# Altium PCB Multi_Board.PcbDoc
Units mil, origin at the board's own origin, x right, y up, seen from the top; angles counter-clockwise.
Board outline 8481.85 x 10278.7 mil, 2 copper layers (Top Layer, Bottom Layer); 4 components, 0 nets, 12 pads, 0 vias.
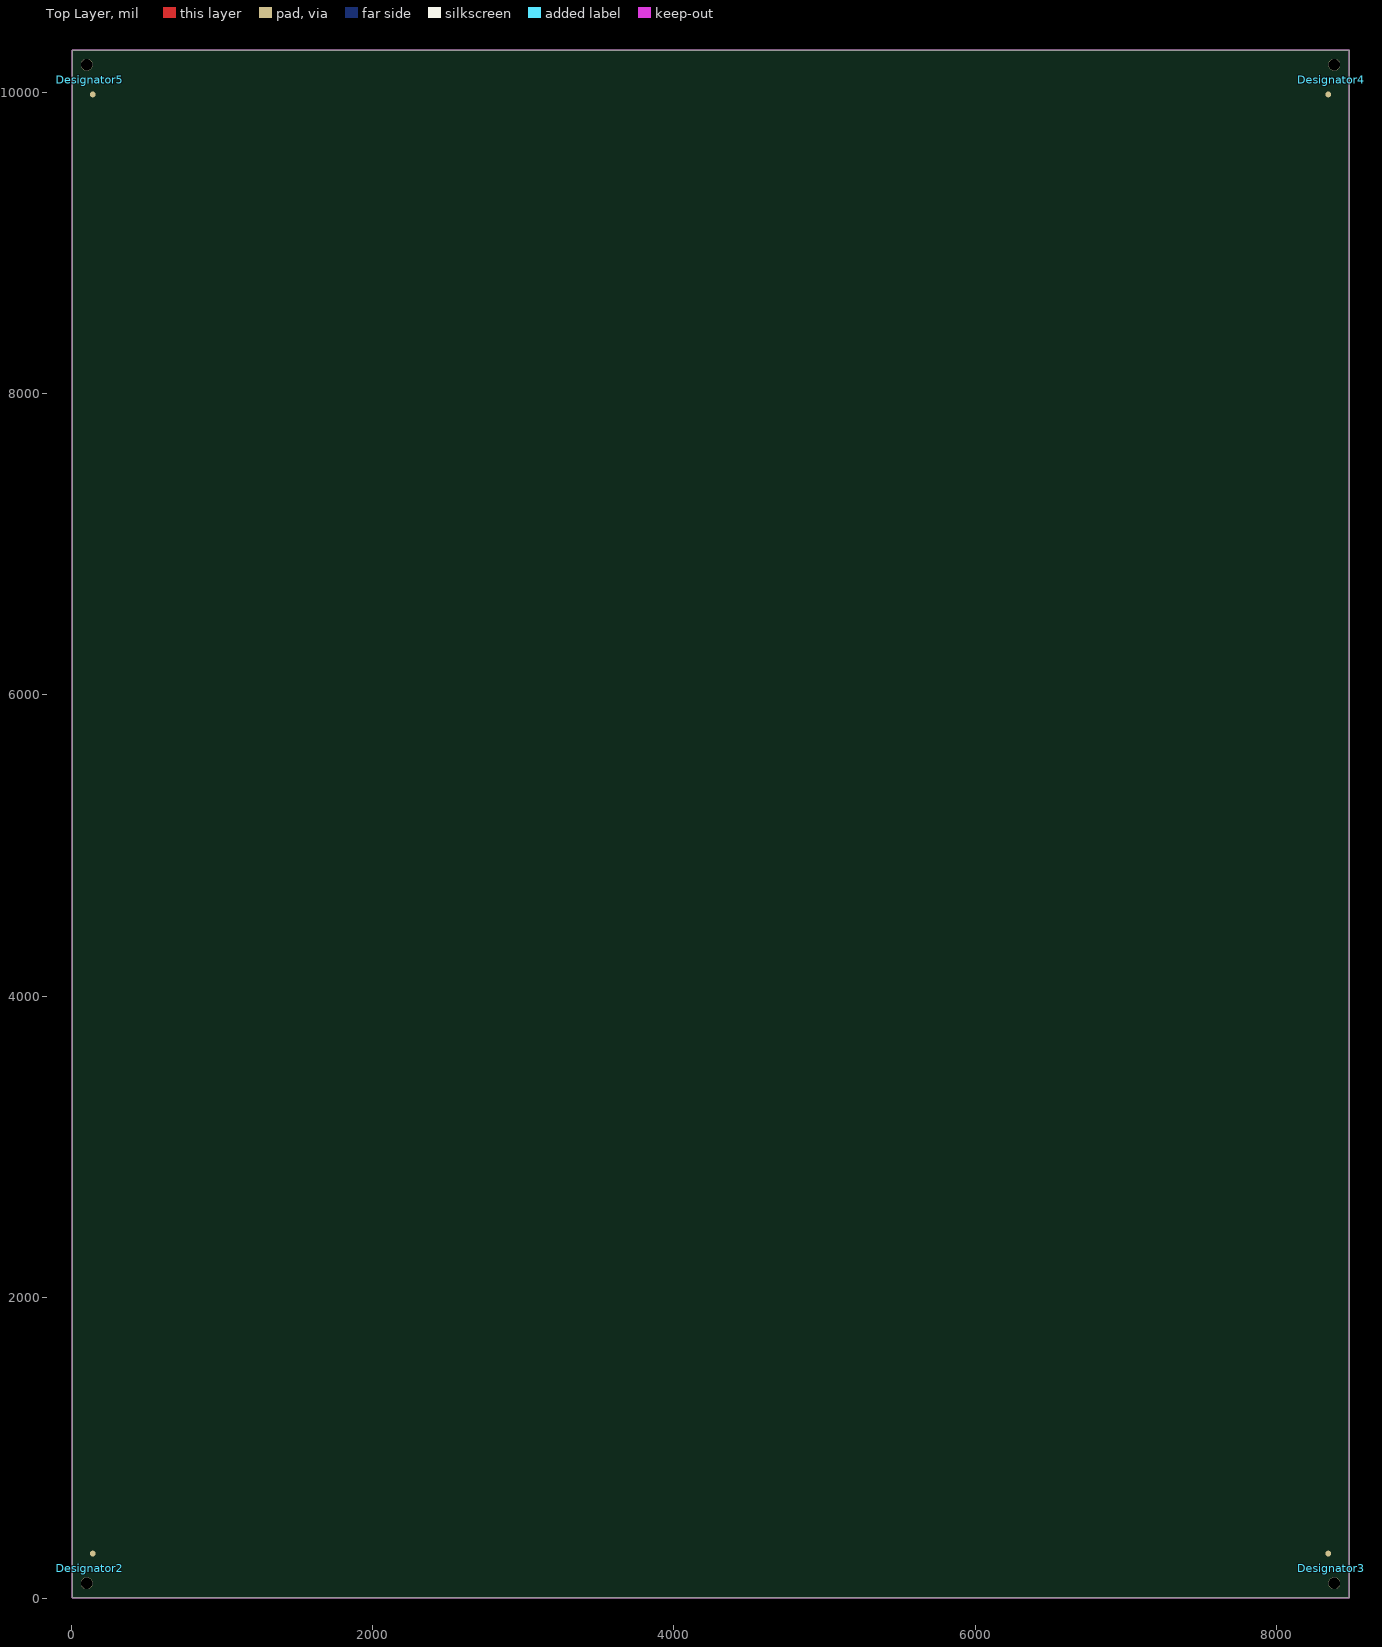
[diagram p0: Top Layer view]
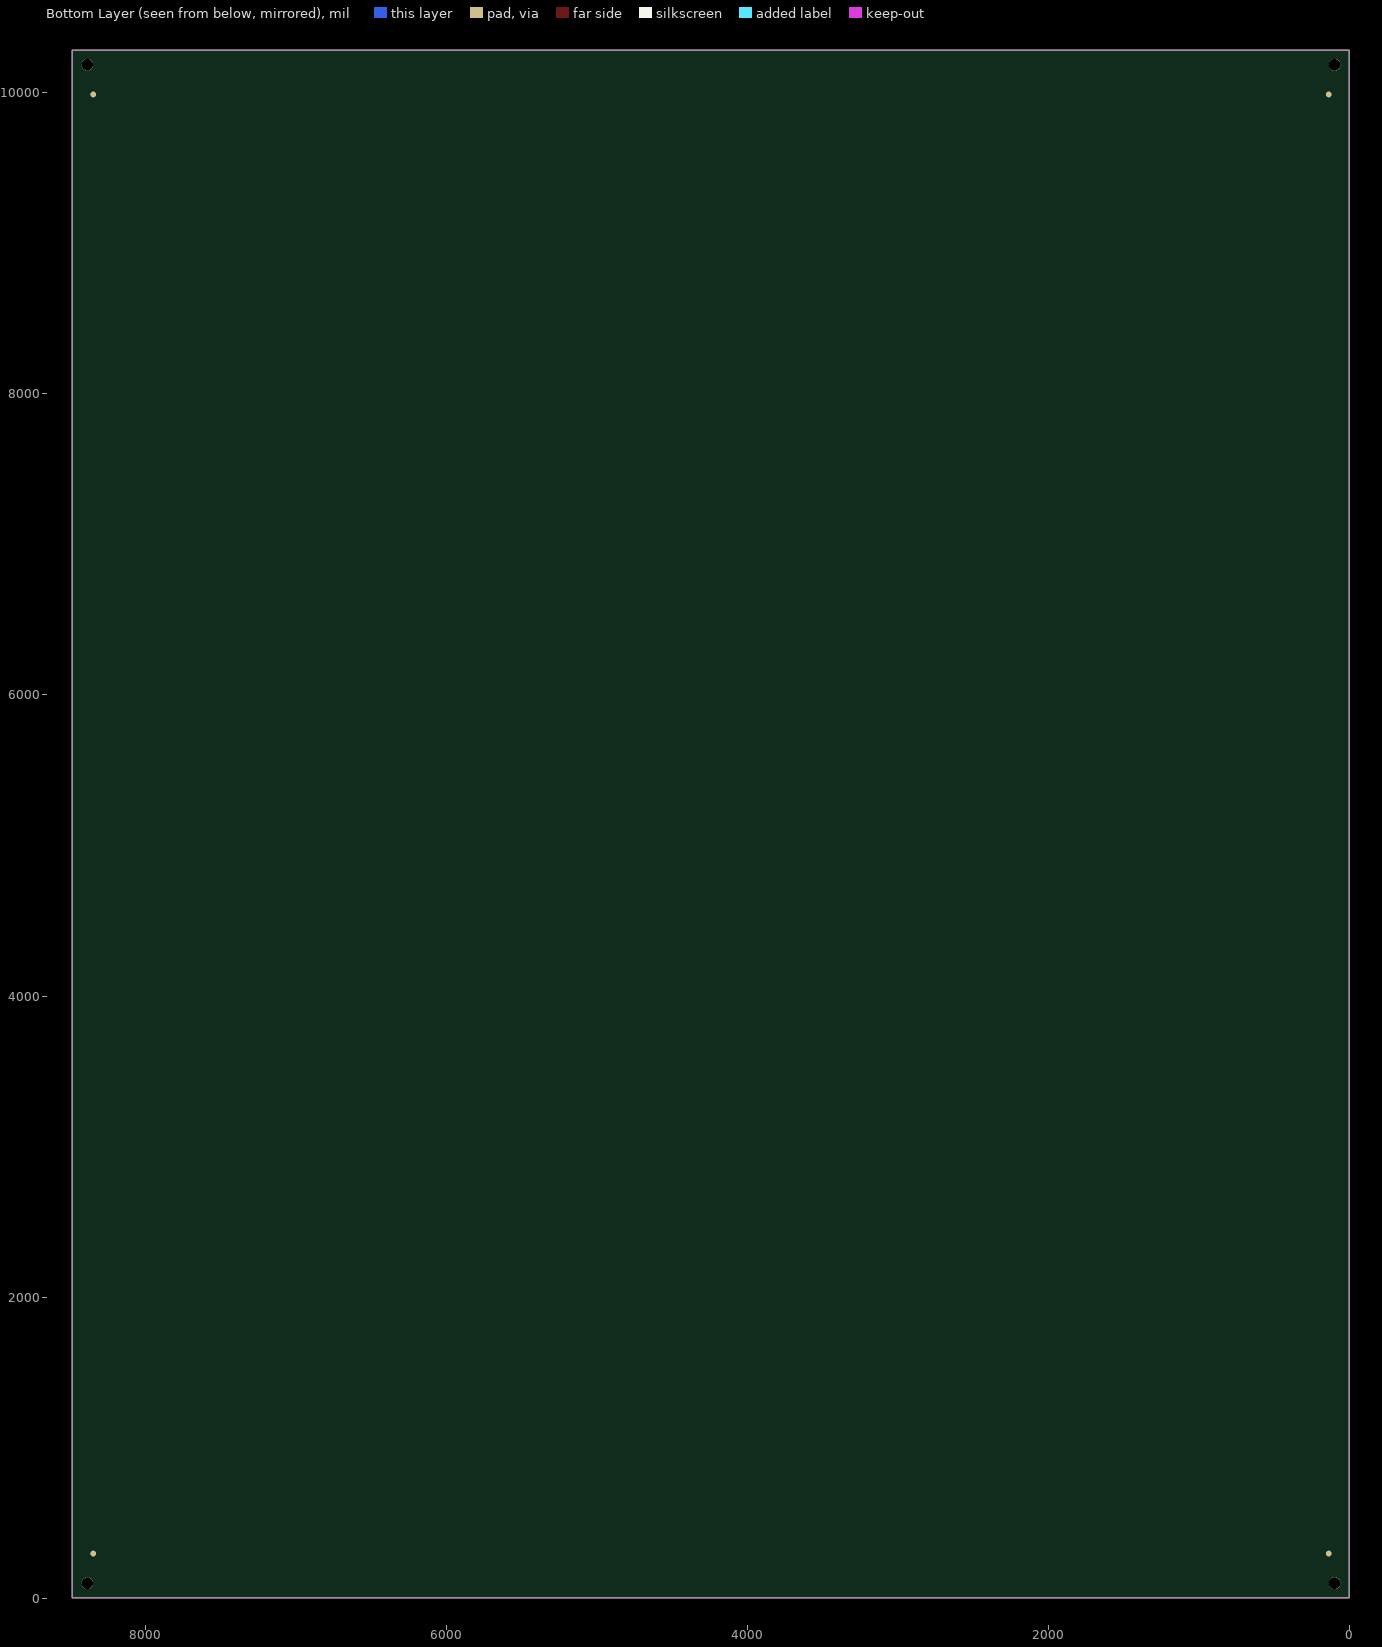
[diagram p1: Bottom Layer view, seen from below]

## Layer stack, top to bottom
Top Solder: solder mask 0.4, Solder Resist, Dk 3.5
Top Layer: signal copper 1.4
Dielectric 1: dielectric 12.6, FR-4, Dk 4.8
Bottom Layer: signal copper 1.4
Bottom Solder: solder mask 0.4, Solder Resist, Dk 3.5

## Board outline
3.15,3.15 3.15,10281.85 8485,10281.85 8485,3.15

## Design rules (kind name [scope] priority, off if disabled: settings)
Clearance [All] p1: gap=10 ignorepadtopadclearanceinfootprint=FALSE
PolygonConnect [All] p1: connectstyle=Relief reliefconductorwidth=10 reliefentries=4 polygonreliefangle="90 Angle" airgapwidth=10
RoutingVias [All] p1: holewidth=28 width=50 viastyle="Through Hole" minholewidth=28 minwidth=50 maxholewidth=28 maxwidth=50
SolderMaskExpansion [All] p1: expansion=4 istentingtop=FALSE
Width [All] p1: maxlimit=10 minlimit=10 preferedwidth=10
30 further rules are at their usual default settings.

## Components (designator, comment, footprint, x,y, rotation, side; value= is the part's Value field where it differs from the comment)
Designator2 "Comment" FM_004#1 100,100 r0 top
Designator3 "Comment" FM_004#2 8385,100 r180 top
Designator4 "Comment" FM_004#1 8385,10185 r180 top
Designator5 "Comment" FM_004#2 100,10185 r0 top

## Footprints (in the part's own frame and the unit in brackets; to place one, negate y for a bottom-side part, rotate by r counter-clockwise, add the part's x,y. Pads: shape width x height; smd on the part's side, far side on the other; paste and mask are expansions set on the pad)
FM_004#1 [mm]
  round 2 hole 2 unplated: 1(0,0)
  round 1 smd paste+0 mask+0.5: 1(1,5)
  round 1 smd far side paste+0 mask+0.5: 1(1,5)
FM_004#2 [mm]
  round 2 hole 2 unplated: 1(0,0)
  round 1 smd paste+0 mask+0.5: 1(1,-5)
  round 1 smd far side paste+0 mask+0.5: 1(1,-5)

## Nets (pads, with @x,y where several pads share a name; then routed paths per layer and width w, separated by ;. In a path a pad name is that pad's centre, name@x,y a point inside that pad or via, vN(x,y) a via of type N, cw(c..) or ccw(c..) an arc to the next point about the centre after c; other vN are vias at no path point)
pads on no net: Designator2.1 Designator3.1 Designator4.1 Designator5.1

## Keep-outs
Keep-Out Layer:
  the board outline again, w10

## Silkscreen, mask and mechanical layers (free items; w line width, h text height)
Mechanical 1:
  drawing of 210 lines, arcs and shapes, not listed
  text "V-CUT Line" at 8535,5082.5 h300

## Panel: embedded boards
"Arduino_DIY_V1.0.PcbDoc" at 195,200, 2 rows x 2 columns, spacing 4952.05 x 4055.9, rotation 0